# Altium PCB HHOLowCost.PcbDoc
Units mm, origin at the board's own origin, x right, y up, seen from the top; angles counter-clockwise.
Board outline 75.25 x 50.25 mm, 2 copper layers (Top Layer, Bottom Layer); 52 components, 29 nets, 578 pads, 8 vias.
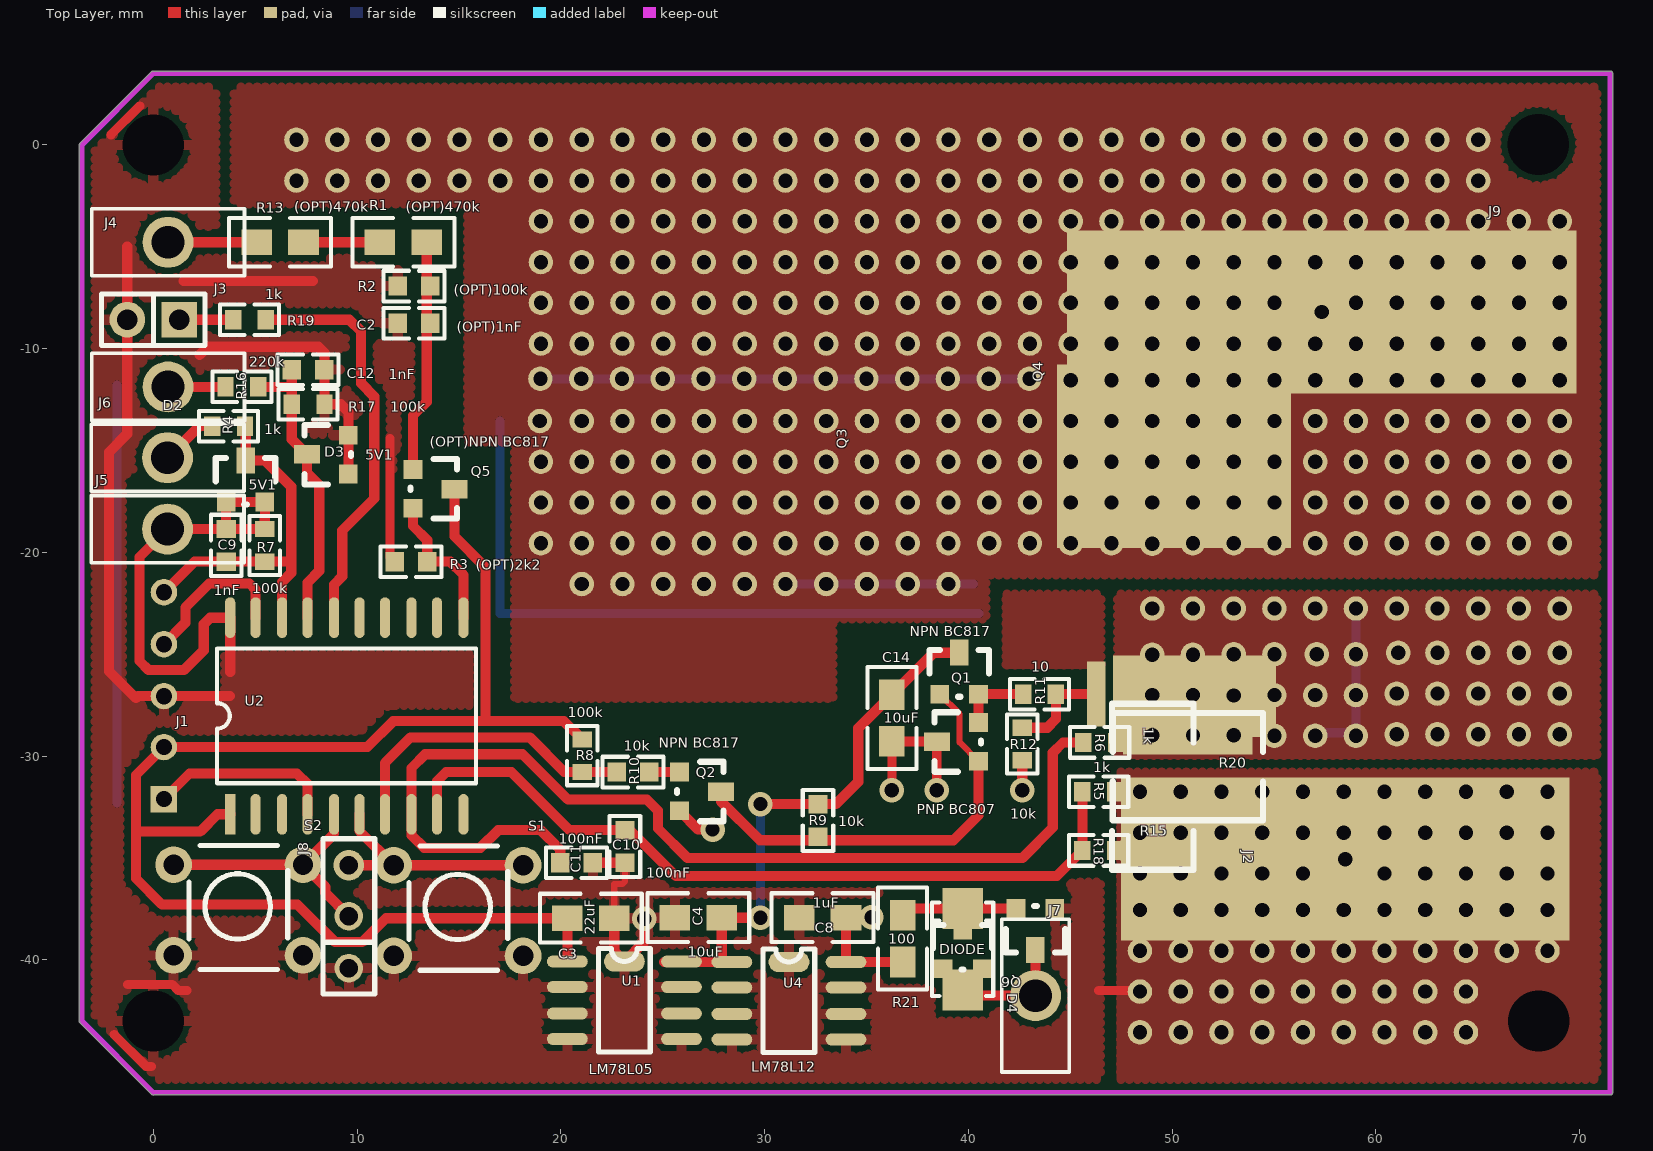
[diagram p0: Top Layer view]
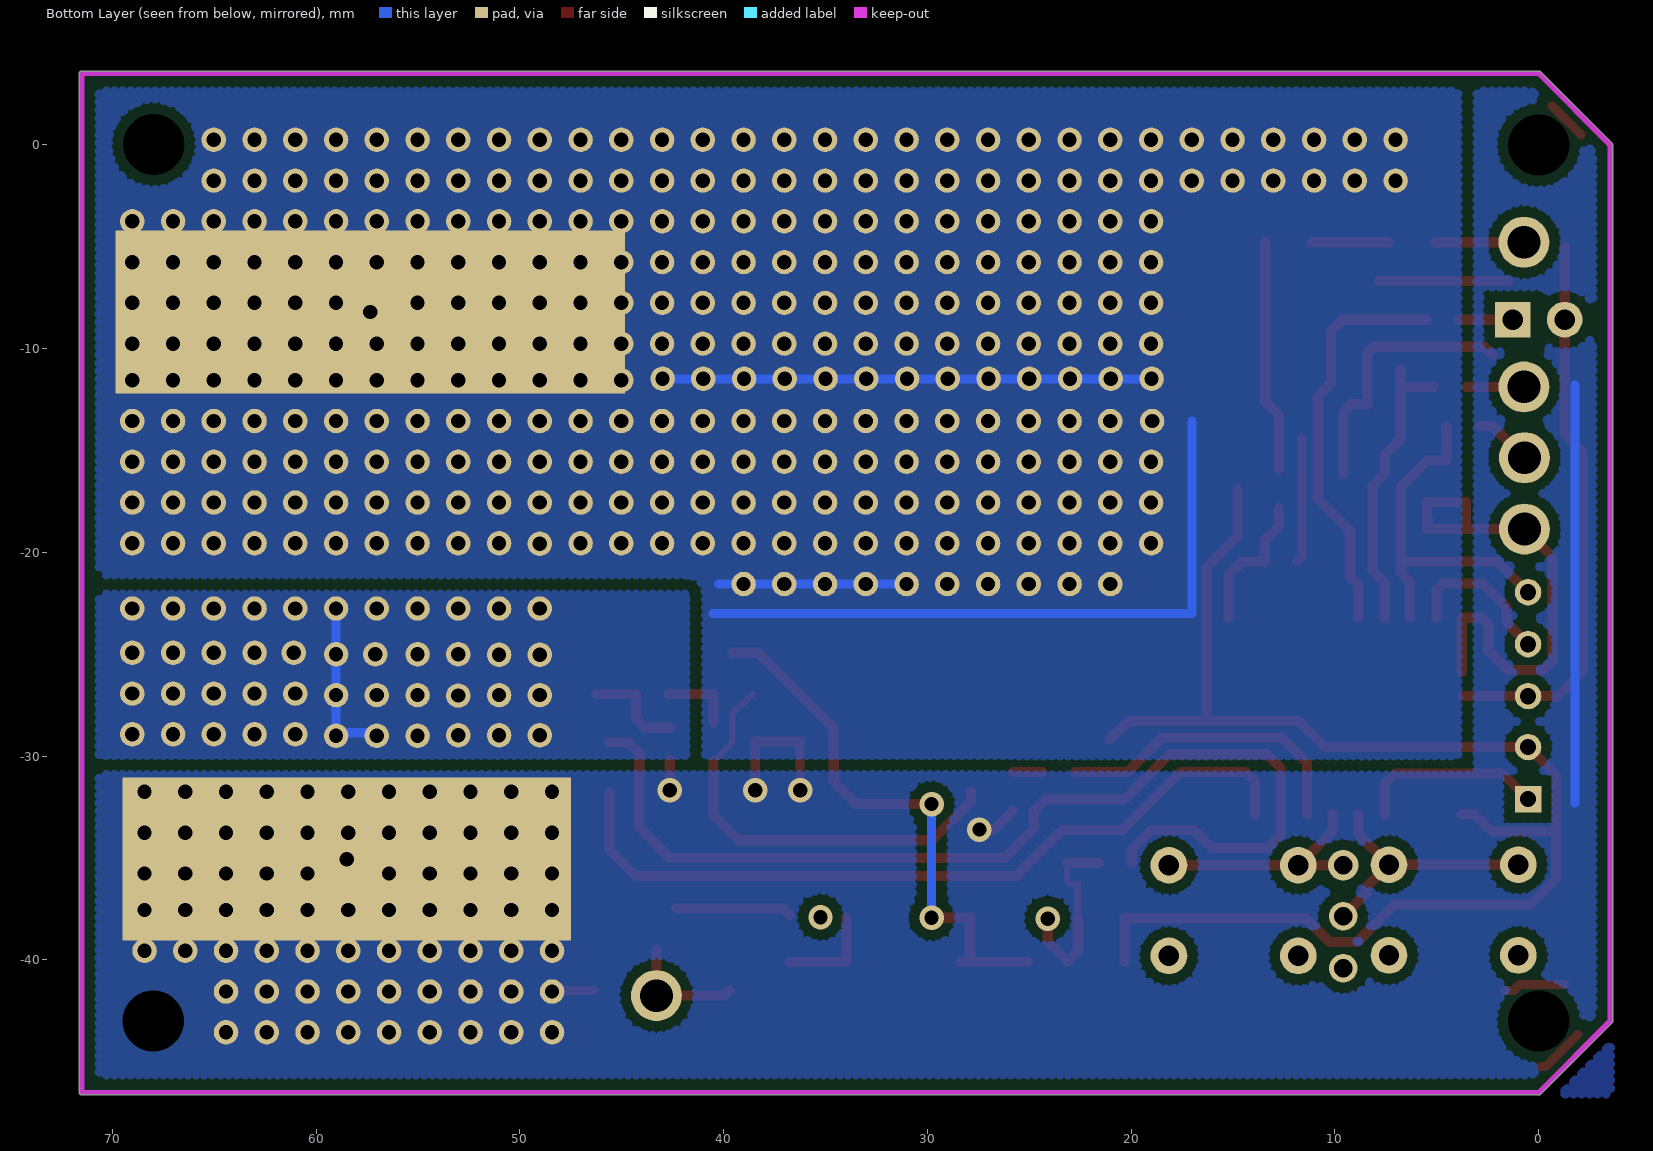
[diagram p1: Bottom Layer view, seen from below]

## Layer stack, top to bottom
Top Layer: signal copper 0.0356
Dielectric: dielectric 0.32, FR-4, Dk 4.8
Bottom Layer: signal copper 0.0356

## Board outline
-3.627,-43 -3.627,0 cw(c-3.5,0) -3.59,0.091 -3.59,0.09 -0.09,3.59 cw(c0,3.5) 0.022,3.625 71.5,3.625 cw(c71.5,3.5) 71.625,3.5 71.625,-46.5 cw(c71.5,-46.5) 71.5,-46.625 0.022,-46.625 cw(c0,-46.5) -0.09,-46.59 -3.59,-43.09 -3.59,-43.091 cw(c-3.5,-43)

## Design rules (kind name [scope] priority, off if disabled: settings)
Clearance "Clearance Polygon" [OnLayer('Bottom Layer')] p1: gap=0.5
Clearance "Clearance Keepout" [OnLayer('Keep-Out Layer')] p2: gap=0.3
Clearance [All] p3: gap=0.3
ComponentClearance [All] p1 off: gap=0 collisioncheckmode=3 verticalgap=0.254 showdistances=FALSE
FabricationTestPointUsage TestPointUsage [All] p1: valid=0 allowmultiple=FALSE
FabricationTestpoint Testpoint [All] p1: side=3 testpointundercomponent=TRUE minsize=1.016 maxsize=2.54 preferedsize=1.524 minholesize=0 maxholesize=1.016 preferedholesize=0.813 testpointgrid=0.025 allowsidetop=TRUE allowsidebottom=TRUE usegrid=TRUE gridtolerance=0
HoleSize [All] p1: absolutevalues=TRUE maxlimit=5 minlimit=0.7 maxpercent=80.000 minpercent=20.000
PolygonConnect PolygonConnectGNDNO [InNet('GND')] p1: connectstyle=NoConnect reliefconductorwidth=0.5 reliefentries=4 polygonreliefangle="90 Angle" airgapwidth=0.254
PolygonConnect PolygonConnectGND_RELIEF [InNet('GND')] p2: connectstyle=Relief reliefconductorwidth=0.5 reliefentries=4 polygonreliefangle="90 Angle" airgapwidth=0.254
PolygonConnect [All] p3: connectstyle=Direct reliefconductorwidth=0.5 reliefentries=4 polygonreliefangle="90 Angle" airgapwidth=0.254
RoutingVias [All] p1: holewidth=0.711 width=1.27 viastyle="Through Hole" minholewidth=0.711 minwidth=1.27 maxholewidth=0.711 maxwidth=1.27
SilkToSolderMaskClearance SilkscreenOverComponentPads [IsPad] p1: minsilkscreentomaskgap=0.254 clearancetoexposedcopper=TRUE
SolderMaskExpansion [All] p1: expansion=0.102
Width [All] p1: maxlimit=5 minlimit=0.3 preferedwidth=0.5 bottomlayer_prefwidth=0.45 minimp=50.000000 maximp=50.000000 favimp=50.000000
23 further rules are at their usual default settings.

## Components (designator, comment, footprint, x,y, rotation, side; value= is the part's Value field where it differs from the comment)
C2 "(OPT)1nF" "0603 CAP" 12.8,-8.75 r180 top
C3 "22uF" 0805 20.325,-37.95 r0 top (schematic designator C?)
C4 "10uF" 0805 27.9,-37.925 r180 top (schematic designator C?)
C8 "1uF" 0805 34,-37.925 r180 top
C9 "1nF" "0603 CAP" 3.575,-19.65 r90 top (schematic designator C21)
C10 "100nF" "0603 CAP" 23.15,-34.425 r270 top (schematic designator C1)
C11 "100nF" "0603 CAP" 20.775,-35.225 r0 top (schematic designator C18)
C12 "1nF" "0603 CAP" 7.6,-11.025 r0 top (schematic designator C43)
C14 "10uF" 0805 36.25,-29.275 r90 top (schematic designator C3)
D2 "5V1" "SOT-23 2 PIN" 3.575,-17.525 r0 top (schematic designator D?)
D3 "5V1" "SOT-23 2 PIN" 9.575,-16.15 r90 top (schematic designator D?)
D4 "DIODE" "SMA + SOT23" 39.725,-37.475 r270 top
J1 "CON5" "SIP5 - PGM" 0.525,-32.1 r90 top
J2 "CON1" "HD 11MM 1P"#1 58.5,-35.05 r270 top
J3 "LED CELL" SIP2 1.275,-8.575 r180 top (schematic designator J6)
J4 "CON1" "HD-351 1P" 0.725,-4.775 r270 top
J5 "CON2" "HD-351 2P" 0.7,-15.35 r270 top
J6 "CON1" "HD-351 1P" 0.725,-11.875 r90 top
J7 "CON1" "HD-351 1P" 43.3,-41.75 r180 top
J8 "CON3" SIP3 9.6,-40.4 r90 top
J9 "CON1" "HD 11MM 1P"#2 57.35,-8.2 r90 top
Q1 "NPN BC817" SOT-23 38.6,-26.95 r0 top (schematic designator Q?)
Q2 "NPN BC817" SOT-23 25.825,-30.775 r270 top (schematic designator Q1)
Q3 "PNP BC807" SOT-23 40.5,-30.25 r90 top (schematic designator Q2)
Q4 "MOSFET N" "D2-PACK - 7" 50.1,-26.95 r90 top
Q5 "(OPT)NPN BC817" SOT-23 12.75,-15.925 r270 top
Q6 "MOSFET P" SOT-23 44.25,-37.475 r180 top
R1 "(OPT)470k" 0805 13.425,-4.775 r180 top
R2 "(OPT)100k" 0603 12.8,-6.925 r180 top
R3 "(OPT)2k2" 0603 12.65,-20.45 r180 top
R4 "1k" "0603 RES" 3.7,-13.8 r180 top
R5 "1k" "0603 RES" 46.4,-31.75 r0 top (schematic designator R1)
R6 "1k" "0603 RES" 46.45,-29.325 r0 top (schematic designator R16)
R7 "100k" "0603 RES" 5.475,-19.65 r270 top (schematic designator R3)
R8 "100k" "0603 RES" 21.05,-29.975 r90 top (schematic designator R38)
R9 "10k" 0603 32.625,-33.15 r270 top (schematic designator R2)
R10 "10k" 0603 23.55,-30.775 r0 top (schematic designator R5)
R11 "10" "0603 RES" 43.5,-26.95 r0 top (schematic designator R6)
R12 "10k" "0603 RES" 42.65,-29.4 r90 top (schematic designator R7)
R13 "(OPT)470k" 0805 7.375,-4.775 r180 top
R15 "0.001" 2512 49.05,-28.425 r270 top (schematic designator R8)
R16 "220k" "0603 RES" 4.35,-11.875 r180 top (schematic designator R34)
R17 "100k" "0603 RES" 7.6,-12.725 r180 top (schematic designator R30)
R18 "1k" "0603 RES" 46.4,-34.625 r0 top
R19 "1k" "0603 RES" 4.725,-8.575 r180 top (schematic designator R17)
R20 "0.001" 1225 50.775,-29.15 r270 top
R21 "100" 0805 36.775,-37.8 r270 top
S1 "SW SPST" TACTBUT 11.8,-35.35 r0 top
S2 "SW SPST" TACTBUT 1,-35.325 r0 top
U1 "LM78L05" "SO-8 VOLTREG" 20.325,-40.075 r0 top
U2 "PIC16F1828" SOIC20WIDE 3.775,-32.85 r90 top (schematic designator U3)
U4 "LM78L12" "SO-8 VOLTREG" 28.4,-40.1 r0 top

## Footprints (in the part's own frame and the unit in brackets; to place one, negate y for a bottom-side part, rotate by r counter-clockwise, add the part's x,y. Pads: shape width x height; smd on the part's side, far side on the other; paste and mask are expansions set on the pad)
0603 [mm]
  rect 0.9x0.95 smd: 1(-0.8,0) 2(0.8,0)
  silkscreen extent -1.5,-0.75 1.5,0.75
"0603 CAP" [mm]
  rect 0.9x0.95 smd: 1(-0.8,0) 2(0.8,0)
  silkscreen extent -1.5,-0.75 1.5,0.75
"0603 RES" [mm]
  rect 0.8x0.95 smd: 1(-0.8,0) 2(0.8,0)
  silkscreen extent -1.45,-0.75 1.45,0.75
0805 [mm]
  rect 1.5x1.25 smd: 1(0,0) 2(2.3,0)
  silkscreen extent -1.35,-1.2 3.65,1.2
1225 [mil]
  rect 60x250 smd: 1(0,0) 2(107.28,0)
  silkscreen extent -50,-145 157,145
2512 [mm]
  rect 1x3.2 smd: 1(0,0) 2(6.2,0)
  silkscreen extent -1,-2 7.15,2
"D2-PACK - 7" [mm]
  rect 3.2x0.9 smd: 1(0,3.825) 3(0,2.55) 3(0,1.275) 3(0,-1.275) 3(0,-2.55) 3(0,-3.825)
  rect 9x11.5 smd: 2(11.675,0)
"HD 11MM 1P"#1 [mm]
  rect 8x22 hole 0.7: 1(0,0)
"HD 11MM 1P"#2 [mm]
  rect 8x25 hole 0.7: 1(0,0)
"HD-351 1P" [mm]
  round 2.5 hole 1.6: 1(0,0)
  silkscreen extent -1.65,-3.75 1.65,3.75
"HD-351 2P" [mm]
  round 2.5 hole 1.6: 1(0,0) 2(3.5,0)
  silkscreen extent -1.65,-3.75 5.15,3.75
SIP2 [mm]
  rect 1.75x1.75 hole 1: 1(0,0)
  round 1.75 hole 1: 2(2.55,0)
  silkscreen extent -1.27,-1.27 3.81,1.27
SIP3 [mm]
  round 1.4 hole 0.9: 1(0,0) 2(2.55,0)
  round 1.5 hole 0.9: 3(5.05,0)
  silkscreen extent -1.27,-1.27 6.35,1.27
"SIP5 - PGM" [mm]
  rect 1.3x1.3 hole 0.8: 1(0,0)
  round 1.3 hole 0.8: 2(2.55,0) 3(5.05,0) 4(7.6,0) 5(10.15,0)
"SMA + SOT23" [mm]
  rect 0.9x0.9 smd: A(2.95,-0.95) A(2.95,0.95)
  rect 2x2 smd: A(4,0) K(0,0)
  rect 1.25x0.9 smd: K(0.9,0)
  silkscreen extent -0.3,-1.5 4.3,1.5
"SO-8 VOLTREG" [mm]
  oval 2x0.6 smd: 1(5.6,0) 2(0,-3.8) 2(0,-2.55) 2(0,-1.25) 2(5.6,-3.8) 2(5.6,-2.55) 2(5.6,-1.25) 3(0,0)
  silkscreen extent 1.52,-4.44 4.06,0.64
SOIC20WIDE [mm]
  rect 2x0.5 smd: 1(0,0)
  oval 2x0.5 smd: 2(0,-1.25) 3(0,-2.55) 4(0,-3.8) 5(0,-5.1) 6(0,-6.35) 7(0,-7.6) 8(0,-8.9) 9(0,-10.15) 10(0,-11.45) 11(9.65,-11.45) 12(9.65,-10.15) 13(9.65,-8.9) 14(9.65,-7.6) 15(9.65,-6.35) 16(9.65,-5.1) 17(9.65,-3.8) 18(9.65,-2.55) 19(9.65,-1.25) 20(9.65,0)
  silkscreen extent 1.52,-12.06 8.13,0.65
SOT-23 [mil]
  rect 36x36 smd: 1(0,0) 3(75,0)
  rect 36x50 smd: 2(38,80)
  silkscreen extent -20,-5 95,85
"SOT-23 2 PIN" [mil]
  rect 36x36 smd: 1(0,0) 1(75,0)
  rect 36x50 smd: 2(38,80)
  silkscreen extent -20,-5 95,85
TACTBUT [mm]
  round 1.8 hole 1: 1(0,0) 1(6.35,0) 2(0,-4.45) 2(6.35,-4.45)
  silkscreen extent 0.75,-5.15 5.6,0.95

## Part data
C2 C3 C4 C8 C9 C10 C11 C12 C14: library part CAP, "Capacitor"
D2 D3: library part ZENER1, "Zener Diode"
D4: "Diode"
J1 J2 J4 J5 J6 J7 J8 J9: "Connector"
J3: library part CON2, "Connector"
Q1 Q2 Q5: library part NPN, "NPN Bipolar Transistor"
Q3: library part PNP, "PNP Bipolar Transistor"
R1 R2 R3 R9 R10 R13: library part Res1, "Resistor"
R4 R5 R6 R7 R8 R11 R12 R15 R16 R17 R18 R19 R20 R21: library part RES1
U1 U4: library part VOLTREG
U2: "Microchip Microcontroller"

## Free pads (board coordinates)
  round 1.5 hole 3: 0(0,-43) 0(0,0) 0(67.975,0.025) 0(68,-43)
  round 1.2 hole 0.7: 0(7.025,-1.75) 0(7.025,0.25) 0(9.025,-1.75) 0(9.025,0.25) 0(11.025,-1.75) 0(11.025,0.25) 0(13.025,-1.75) 0(13.025,0.25) 0(15.025,-1.75) 0(15.025,0.25) 0(17.025,-1.75) 0(17.025,0.25) 0(18.975,-13.55) 0(19,-11.475) 0(19.025,-19.55) 0(19.025,-17.55) 0(19.025,-15.55) 0(19.025,-9.75) 0(19.025,-7.75) 0(19.025,-5.75) 0(19.025,-3.75) 0(19.025,-1.75) 0(19.025,0.25) 0(21,-11.475) 0(21.025,-21.55) 0(21.025,-19.55) 0(21.025,-17.55) 0(21.025,-15.55) 0(21.025,-13.55) 0(21.025,-9.75) 0(21.025,-7.75) 0(21.025,-5.75) 0(21.025,-3.75) 0(21.025,-1.75) 0(21.025,0.25) 0(23,-11.475) 0(23.025,-21.55) 0(23.025,-19.55) 0(23.025,-17.55) 0(23.025,-15.55) 0(23.025,-13.55) 0(23.025,-9.75) 0(23.025,-7.75) 0(23.025,-5.75) 0(23.025,-3.75) 0(23.025,-1.75) 0(23.025,0.25) 0(25,-11.475) 0(25.025,-21.55) 0(25.025,-19.55) 0(25.025,-17.55) 0(25.025,-15.55) 0(25.025,-13.55) 0(25.025,-9.75) 0(25.025,-7.75) 0(25.025,-5.75) 0(25.025,-3.75) 0(25.025,-1.75) 0(25.025,0.25) 0(27,-11.475) 0(27.025,-21.55) 0(27.025,-19.55) 0(27.025,-17.55) 0(27.025,-15.55) 0(27.025,-13.55) 0(27.025,-9.75) 0(27.025,-7.75) 0(27.025,-5.75) 0(27.025,-3.75) 0(27.025,-1.75) 0(27.025,0.25) 0(29,-11.475) 0(29.025,-21.55) 0(29.025,-19.55) 0(29.025,-17.55) 0(29.025,-15.55) 0(29.025,-13.55) 0(29.025,-9.75) 0(29.025,-7.75) 0(29.025,-5.75) 0(29.025,-3.75) 0(29.025,-1.75) 0(29.025,0.25) 0(31,-11.475) 0(31.025,-21.55) 0(31.025,-19.55) 0(31.025,-17.55) 0(31.025,-15.55) 0(31.025,-13.55) 0(31.025,-9.75) 0(31.025,-7.75) 0(31.025,-5.75) 0(31.025,-3.75) 0(31.025,-1.75) 0(31.025,0.25) 0(33,-11.475) 0(33.025,-19.55) 0(33.025,-17.55) 0(33.025,-15.55) 0(33.025,-13.55) 0(33.025,-9.75) 0(33.025,-7.75) 0(33.025,-5.75) 0(33.025,-3.75) 0(33.025,-1.75) 0(33.025,0.25) 0(33.025,-21.55) 0(35,-11.475) 0(35.025,-19.55) 0(35.025,-17.55) 0(35.025,-15.55) 0(35.025,-13.55) 0(35.025,-9.75) 0(35.025,-7.75) 0(35.025,-5.75) 0(35.025,-3.75) 0(35.025,-1.75) 0(35.025,0.25) 0(35.025,-21.55) 0(37,-11.475) 0(37.025,-19.55) 0(37.025,-17.55) 0(37.025,-15.55) 0(37.025,-13.55) 0(37.025,-9.75) 0(37.025,-7.75) 0(37.025,-5.75) 0(37.025,-3.75) 0(37.025,-1.75) 0(37.025,0.25) 0(37.025,-21.55) 0(39,-11.475) 0(39.025,-21.55) 0(39.025,-19.55) 0(39.025,-17.55) 0(39.025,-15.55) 0(39.025,-13.55) 0(39.025,-9.75) 0(39.025,-7.75) 0(39.025,-5.75) 0(39.025,-3.75) 0(39.025,-1.75) 0(39.025,0.25) 0(41,-11.475) 0(41.025,-19.55) 0(41.025,-17.55) 0(41.025,-15.55) 0(41.025,-13.55) 0(41.025,-9.75) 0(41.025,-7.75) 0(41.025,-5.75) 0(41.025,-3.75) 0(41.025,-1.75) 0(41.025,0.25) 0(43,-11.475) 0(43.025,-19.55) 0(43.025,-17.55) 0(43.025,-15.55) 0(43.025,-13.55) 0(43.025,-9.75) 0(43.025,-7.75) 0(43.025,-5.75) 0(43.025,-3.75) 0(43.025,-1.75) 0(43.025,0.25) 0(45.025,-19.55) 0(45.025,-17.55) 0(45.025,-15.55) 0(45.025,-13.55) 0(45.025,-9.75) 0(45.025,-7.75) 0(45.025,-5.75) 0(45.025,-3.75) 0(45.025,-1.75) 0(45.025,0.25) 0(45.025,-11.55) 0(47.025,-19.55) 0(47.025,-17.55) 0(47.025,-15.55) 0(47.025,-13.55) 0(47.025,-11.55) 0(47.025,-7.75) 0(47.025,-5.75) 0(47.025,-3.75) 0(47.025,-1.75) 0(47.025,0.25) 0(47.025,-9.75) 0(48.425,-43.55) 0(48.425,-41.55) 0(48.425,-39.55) 0(48.425,-37.55) 0(48.425,-35.75) 0(48.425,-33.75) 0(48.425,-31.75) 0(49.025,-28.975) 0(49.025,-27) 0(49.025,-25.025) 0(49.025,-19.575) 0(49.025,-17.55) 0(49.025,-15.55) 0(49.025,-13.55) 0(49.025,-11.55) 0(49.025,-9.75) 0(49.025,-7.75) 0(49.025,-5.75) 0(49.025,-3.75) 0(49.025,-1.75) 0(49.025,0.25) 0(49.025,-22.75) 0(50.425,-43.55) 0(50.425,-41.55) 0(50.425,-39.55) 0(50.425,-37.55) 0(50.425,-35.75) 0(50.425,-33.75) 0(50.425,-31.75) 0(51.025,-11.55) 0(51.025,-9.75) 0(51.025,-7.75) 0(51.025,-5.75) 0(51.025,-3.75) 0(51.025,-1.75) 0(51.025,0.25) 0(51.025,-28.975) 0(51.025,-27) 0(51.025,-25.025) 0(51.025,-19.55) 0(51.025,-17.55) 0(51.025,-15.55) 0(51.025,-13.55) 0(51.025,-22.75) 0(52.425,-43.55) 0(52.425,-41.55) 0(52.425,-39.55) 0(52.425,-37.55) 0(52.425,-35.75) 0(52.425,-33.75) 0(52.425,-31.75) 0(53.025,-28.975) 0(53.025,-27.025) 0(53.025,-25) 0(53.025,-19.55) 0(53.025,-17.55) 0(53.025,-15.55) 0(53.025,-13.55) 0(53.025,-11.55) 0(53.025,-9.75) 0(53.025,-7.75) 0(53.025,-5.75) 0(53.025,-3.75) 0(53.025,-1.75) 0(53.025,0.25) 0(53.025,-22.75) 0(54.425,-43.55) 0(54.425,-41.55) 0(54.425,-39.55) 0(54.425,-37.55) 0(54.425,-35.75) 0(54.425,-33.75) 0(54.425,-31.75) 0(55.025,-11.55) 0(55.025,-9.75) 0(55.025,-7.75) 0(55.025,-5.75) 0(55.025,-3.75) 0(55.025,-1.75) 0(55.025,0.25) 0(55.025,-29) 0(55.025,-27) 0(55.025,-25) 0(55.025,-19.55) 0(55.025,-17.55) 0(55.025,-15.55) 0(55.025,-13.55) 0(55.025,-22.75) 0(56.425,-43.55) 0(56.425,-41.55) 0(56.425,-39.55) 0(56.425,-37.55) 0(56.425,-35.75) 0(56.425,-33.75) 0(56.425,-31.75) 0(57.025,-9.75) 0(57.025,-5.75) 0(57.025,-3.75) 0(57.025,-1.75) 0(57.025,0.25) 0(57.025,-19.55) 0(57.025,-17.55) 0(57.025,-15.55) 0(57.025,-13.55) 0(57.025,-11.55) 0(57.025,-27) 0(57.025,-22.75) 0(57.025,-29) 0(57.1,-25) 0(58.425,-43.55) 0(58.425,-41.55) 0(58.425,-39.55) 0(58.425,-37.55) 0(58.425,-33.75) 0(58.425,-31.75) 0(59.025,-19.55) 0(59.025,-17.55) 0(59.025,-15.55) 0(59.025,-13.55) 0(59.025,-11.55) 0(59.025,-9.75) 0(59.025,-7.75) 0(59.025,-5.75) 0(59.025,-3.75) 0(59.025,-1.75) 0(59.025,0.25) 0(59.025,-27) 0(59.025,-22.75) 0(59.025,-29) 0(59.025,-25) 0(60.425,-43.55) 0(60.425,-41.55) 0(60.425,-39.55) 0(60.425,-37.55) 0(60.425,-35.75) 0(60.425,-33.75) 0(60.425,-31.75) 0(61.025,-9.75) 0(61.025,-7.75) 0(61.025,-5.75) 0(61.025,-3.75) 0(61.025,-1.75) 0(61.025,0.25) 0(61.025,-19.55) 0(61.025,-17.55) 0(61.025,-15.55) 0(61.025,-13.55) 0(61.025,-11.55) 0(61.025,-28.925) 0(61.025,-26.925) 0(61.025,-22.75) 0(61.1,-24.925) 0(62.425,-43.55) 0(62.425,-41.55) 0(62.425,-39.55) 0(62.425,-37.55) 0(62.425,-35.75) 0(62.425,-33.75) 0(62.425,-31.75) 0(63.025,-26.925) 0(63.025,-19.55) 0(63.025,-17.55) 0(63.025,-15.55) 0(63.025,-13.55) 0(63.025,-11.55) 0(63.025,-9.75) 0(63.025,-7.75) 0(63.025,-5.75) 0(63.025,-3.75) 0(63.025,-1.75) 0(63.025,0.25) 0(63.025,-28.925) 0(63.025,-24.925) 0(63.025,-22.75) 0(64.425,-43.55) 0(64.425,-41.55) 0(64.425,-39.55) 0(64.425,-37.55) 0(64.425,-35.75) 0(64.425,-33.75) 0(64.425,-31.75) 0(65.025,-19.55) 0(65.025,-17.55) 0(65.025,-15.55) 0(65.025,-13.55) 0(65.025,-11.55) 0(65.025,-9.75) 0(65.025,-7.75) 0(65.025,-5.75) 0(65.025,-3.75) 0(65.025,-1.75) 0(65.025,0.25) 0(65.025,-28.925) 0(65.025,-26.925) 0(65.025,-24.925) 0(65.025,-22.75) 0(66.425,-39.55) 0(66.425,-37.55) 0(66.425,-35.75) 0(66.425,-33.75) 0(66.425,-31.75) 0(67.025,-19.55) 0(67.025,-17.55) 0(67.025,-15.55) 0(67.025,-13.55) 0(67.025,-11.55) 0(67.025,-9.75) 0(67.025,-7.75) 0(67.025,-5.75) 0(67.025,-3.75) 0(67.025,-28.925) 0(67.025,-26.925) 0(67.025,-24.925) 0(67.025,-22.75) 0(68.425,-39.55) 0(68.425,-37.55) 0(68.425,-35.75) 0(68.425,-33.75) 0(68.425,-31.75) 0(69.025,-19.55) 0(69.025,-17.55) 0(69.025,-15.55) 0(69.025,-13.55) 0(69.025,-11.55) 0(69.025,-9.75) 0(69.025,-7.75) 0(69.025,-5.75) 0(69.025,-3.75) 0(69.025,-28.925) 0(69.025,-26.925) 0(69.025,-24.925) 0(69.025,-22.75)
  oval 2x1 smd: 0(23.125,-40.075) 0(31.2,-40.1)
  rect 8x4 smd: 0(51.1,-27.05)

## Via types
v1: diameter 1.2, hole 0.7, Top Layer to Bottom Layer, 8 vias

## Nets (pads, with @x,y where several pads share a name; then routed paths per layer and width w, separated by ;. In a path a pad name is that pad's centre, name@x,y a point inside that pad or via, vN(x,y) a via of type N, cw(c..) or ccw(c..) an arc to the next point about the centre after c; other vN are vias at no path point)
"12-24V IN": C8.1 R21.2 U4.1 | length 5
  Top Layer w0.5: C8.1 U4.1 R21.2
  other v1: 35.25,-37.9
12V: C4.1 C14.2 Q1.2 R9.1 U1.1 U4.3 | length 27.3
  Top Layer w0.5: U1.1@25.075,-40.1 U4.3 ; U4.3@27.9,-40.075 C4.1 v1(29.8,-37.925) ; v1(29.8,-32.35) R9.1 33.5,-32.35 34.6,-31.25 34.6,-28.625 38.307,-24.918 Q1.2
  Bottom Layer w0.45: v1(29.8,-37.925) v1(29.8,-32.35)
COIL: Q5.3 R3.1 U2.11 | length 7.1
  Top Layer w0.5: Q5.3 12.75,-18.7 13.45,-19.4 R3.1 14.575,-20.45 15.225,-21.1 U2.11
CSFB: C11.1 R6.1 U2.8 | length 52.6
  Top Layer w0.5: C11.1 19.975,-34.575 19.025,-33.625 16.925,-33.625 16.05,-34.5 13.3,-34.5 12.675,-33.875 12.675,-30.575 13.35,-29.9 18.125,-29.9 20.35,-32.125 24.225,-32.125 24.775,-32.675 24.775,-33.55 26.225,-35 42.65,-35 44.15,-33.5 44.15,-29.825 44.65,-29.325 R6.1
CSREF: C10.1 R5.1 R18.1 U2.9 | length 39
  Top Layer w0.5: U2.9 13.925,-31.225 14.375,-30.775 17.575,-30.775 20.425,-33.625 23.4,-33.625 25.65,-35.875 44.35,-35.875 R18.1 45.6,-33.5 R5.1
DRAIN: J9.1 pad.0@7.025,0.25 pad.0@7.025,-1.75 pad.0@9.025,0.25 pad.0@9.025,-1.75 pad.0@11.025,0.25 pad.0@11.025,-1.75 pad.0@13.025,0.25 pad.0@13.025,-1.75 pad.0@15.025,0.25 pad.0@15.025,-1.75 pad.0@17.025,0.25 pad.0@17.025,-1.75 pad.0@18.975,-13.55 pad.0@19,-11.475 pad.0@19.025,0.25 pad.0@19.025,-1.75 pad.0@19.025,-3.75 pad.0@19.025,-5.75 pad.0@19.025,-7.75 pad.0@19.025,-9.75 pad.0@19.025,-15.55 pad.0@19.025,-17.55 pad.0@19.025,-19.55 pad.0@21,-11.475 pad.0@21.025,0.25 pad.0@21.025,-1.75 pad.0@21.025,-3.75 pad.0@21.025,-5.75 pad.0@21.025,-7.75 pad.0@21.025,-9.75 pad.0@21.025,-13.55 pad.0@21.025,-15.55 pad.0@21.025,-17.55 pad.0@21.025,-19.55 pad.0@21.025,-21.55 pad.0@23,-11.475 pad.0@23.025,0.25 pad.0@23.025,-1.75 pad.0@23.025,-3.75 pad.0@23.025,-5.75 pad.0@23.025,-7.75 pad.0@23.025,-9.75 pad.0@23.025,-13.55 pad.0@23.025,-15.55 pad.0@23.025,-17.55 pad.0@23.025,-19.55 pad.0@23.025,-21.55 pad.0@25,-11.475 pad.0@25.025,0.25 pad.0@25.025,-1.75 pad.0@25.025,-3.75 pad.0@25.025,-5.75 pad.0@25.025,-7.75 pad.0@25.025,-9.75 pad.0@25.025,-13.55 pad.0@25.025,-15.55 pad.0@25.025,-17.55 pad.0@25.025,-19.55 pad.0@25.025,-21.55 pad.0@27,-11.475 pad.0@27.025,0.25 pad.0@27.025,-1.75 pad.0@27.025,-3.75 pad.0@27.025,-5.75 pad.0@27.025,-7.75 pad.0@27.025,-9.75 pad.0@27.025,-13.55 pad.0@27.025,-15.55 pad.0@27.025,-17.55 pad.0@27.025,-19.55 pad.0@27.025,-21.55 pad.0@29,-11.475 pad.0@29.025,0.25 pad.0@29.025,-1.75 pad.0@29.025,-3.75 pad.0@29.025,-5.75 pad.0@29.025,-7.75 pad.0@29.025,-9.75 pad.0@29.025,-13.55 pad.0@29.025,-15.55 pad.0@29.025,-17.55 pad.0@29.025,-19.55 pad.0@29.025,-21.55 pad.0@31,-11.475 pad.0@31.025,0.25 pad.0@31.025,-1.75 pad.0@31.025,-3.75 pad.0@31.025,-5.75 pad.0@31.025,-7.75 pad.0@31.025,-9.75 pad.0@31.025,-13.55 pad.0@31.025,-15.55 pad.0@31.025,-17.55 pad.0@31.025,-19.55 pad.0@31.025,-21.55 pad.0@33,-11.475 pad.0@33.025,0.25 pad.0@33.025,-1.75 pad.0@33.025,-3.75 pad.0@33.025,-5.75 pad.0@33.025,-7.75 pad.0@33.025,-9.75 pad.0@33.025,-13.55 pad.0@33.025,-15.55 pad.0@33.025,-17.55 pad.0@33.025,-19.55 pad.0@33.025,-21.55 pad.0@35,-11.475 pad.0@35.025,0.25 pad.0@35.025,-1.75 pad.0@35.025,-3.75 pad.0@35.025,-5.75 pad.0@35.025,-7.75 pad.0@35.025,-9.75 pad.0@35.025,-13.55 pad.0@35.025,-15.55 pad.0@35.025,-17.55 pad.0@35.025,-19.55 pad.0@35.025,-21.55 pad.0@37,-11.475 pad.0@37.025,0.25 pad.0@37.025,-1.75 pad.0@37.025,-3.75 pad.0@37.025,-5.75 pad.0@37.025,-7.75 pad.0@37.025,-9.75 pad.0@37.025,-13.55 pad.0@37.025,-15.55 pad.0@37.025,-17.55 pad.0@37.025,-19.55 pad.0@37.025,-21.55 pad.0@39,-11.475 pad.0@39.025,0.25 pad.0@39.025,-1.75 pad.0@39.025,-3.75 pad.0@39.025,-5.75 pad.0@39.025,-7.75 pad.0@39.025,-9.75 pad.0@39.025,-13.55 pad.0@39.025,-15.55 pad.0@39.025,-17.55 pad.0@39.025,-19.55 pad.0@39.025,-21.55 pad.0@41,-11.475 pad.0@41.025,0.25 pad.0@41.025,-1.75 pad.0@41.025,-3.75 pad.0@41.025,-5.75 pad.0@41.025,-7.75 pad.0@41.025,-9.75 pad.0@41.025,-13.55 pad.0@41.025,-15.55 pad.0@41.025,-17.55 pad.0@41.025,-19.55 pad.0@43,-11.475 pad.0@43.025,0.25 pad.0@43.025,-1.75 pad.0@43.025,-3.75 pad.0@43.025,-5.75 pad.0@43.025,-7.75 pad.0@43.025,-9.75 pad.0@43.025,-13.55 pad.0@43.025,-15.55 pad.0@43.025,-17.55 pad.0@43.025,-19.55 pad.0@45.025,0.25 pad.0@45.025,-1.75 pad.0@45.025,-3.75 pad.0@45.025,-5.75 pad.0@45.025,-7.75 pad.0@45.025,-9.75 pad.0@45.025,-11.55 pad.0@45.025,-13.55 pad.0@45.025,-15.55 pad.0@45.025,-17.55 pad.0@45.025,-19.55 pad.0@47.025,0.25 pad.0@47.025,-1.75 pad.0@47.025,-3.75 pad.0@47.025,-5.75 pad.0@47.025,-7.75 pad.0@47.025,-9.75 pad.0@47.025,-11.55 pad.0@47.025,-13.55 pad.0@47.025,-15.55 pad.0@47.025,-17.55 pad.0@47.025,-19.55 pad.0@49.025,0.25 pad.0@49.025,-1.75 pad.0@49.025,-3.75 pad.0@49.025,-5.75 pad.0@49.025,-7.75 pad.0@49.025,-9.75 pad.0@49.025,-11.55 pad.0@49.025,-13.55 pad.0@49.025,-15.55 pad.0@49.025,-17.55 pad.0@49.025,-19.575 pad.0@51.025,0.25 pad.0@51.025,-1.75 pad.0@51.025,-3.75 pad.0@51.025,-5.75 pad.0@51.025,-7.75 pad.0@51.025,-9.75 pad.0@51.025,-11.55 pad.0@51.025,-13.55 pad.0@51.025,-15.55 pad.0@51.025,-17.55 pad.0@51.025,-19.55 pad.0@53.025,0.25 pad.0@53.025,-1.75 pad.0@53.025,-3.75 pad.0@53.025,-5.75 pad.0@53.025,-7.75 pad.0@53.025,-9.75 pad.0@53.025,-11.55 pad.0@53.025,-13.55 pad.0@53.025,-15.55 pad.0@53.025,-17.55 pad.0@53.025,-19.55 pad.0@55.025,0.25 pad.0@55.025,-1.75 pad.0@55.025,-3.75 pad.0@55.025,-5.75 pad.0@55.025,-7.75 pad.0@55.025,-9.75 pad.0@55.025,-11.55 pad.0@55.025,-13.55 pad.0@55.025,-15.55 pad.0@55.025,-17.55 pad.0@55.025,-19.55 pad.0@57.025,0.25 pad.0@57.025,-1.75 pad.0@57.025,-3.75 pad.0@57.025,-5.75 pad.0@57.025,-9.75 pad.0@57.025,-11.55 pad.0@57.025,-13.55 pad.0@57.025,-15.55 pad.0@57.025,-17.55 pad.0@57.025,-19.55 pad.0@59.025,0.25 pad.0@59.025,-1.75 pad.0@59.025,-3.75 pad.0@59.025,-5.75 pad.0@59.025,-7.75 pad.0@59.025,-9.75 pad.0@59.025,-11.55 pad.0@59.025,-13.55 pad.0@59.025,-15.55 pad.0@59.025,-17.55 pad.0@59.025,-19.55 pad.0@61.025,0.25 pad.0@61.025,-1.75 pad.0@61.025,-3.75 pad.0@61.025,-5.75 pad.0@61.025,-7.75 pad.0@61.025,-9.75 pad.0@61.025,-11.55 pad.0@61.025,-13.55 pad.0@61.025,-15.55 pad.0@61.025,-17.55 pad.0@61.025,-19.55 pad.0@63.025,0.25 pad.0@63.025,-1.75 pad.0@63.025,-3.75 pad.0@63.025,-5.75 pad.0@63.025,-7.75 pad.0@63.025,-9.75 pad.0@63.025,-11.55 pad.0@63.025,-13.55 pad.0@63.025,-15.55 pad.0@63.025,-17.55 pad.0@63.025,-19.55 pad.0@65.025,0.25 pad.0@65.025,-1.75 pad.0@65.025,-3.75 pad.0@65.025,-5.75 pad.0@65.025,-7.75 pad.0@65.025,-9.75 pad.0@65.025,-11.55 pad.0@65.025,-13.55 pad.0@65.025,-15.55 pad.0@65.025,-17.55 pad.0@65.025,-19.55 pad.0@67.025,-3.75 pad.0@67.025,-5.75 pad.0@67.025,-7.75 pad.0@67.025,-9.75 pad.0@67.025,-11.55 pad.0@67.025,-13.55 pad.0@67.025,-15.55 pad.0@67.025,-17.55 pad.0@67.025,-19.55 pad.0@69.025,-3.75 pad.0@69.025,-5.75 pad.0@69.025,-7.75 pad.0@69.025,-9.75 pad.0@69.025,-11.55 pad.0@69.025,-13.55 pad.0@69.025,-15.55 pad.0@69.025,-17.55 pad.0@69.025,-19.55 Q4.2 | length 66.7
  Bottom Layer w0.45: 17.025,-13.55 17.025,-23 40.525,-23 ; pad.0@18.65,-11.5 pad.0@43.2,-11.475 ; pad.0@31.025,-21.55 40.25,-21.55
GATE: Q4.1 R11.2 R12.2 | length 5
  Top Layer w0.5: R12.2 43.875,-28.6 44.3,-28.175 R11.2 Q4.1
GATEOUT: Q1.3 Q3.3 R11.1 | length 3.6
  Top Layer w0.5: Q3.3 40.5,-26.955 Q1.3 R11.1
GND: C2.2 C3.2 C4.2 C8.2 C9.2 C10.2 C11.2 C12.2 C14.1 D2.1 D3.1 J1.3 J2.1 J3.2 J5.2 J8.1 pad.0@0,0 pad.0@0,-43 pad.0@23.125,-40.075 pad.0@31.2,-40.1 pad.0@48.425,-31.75 pad.0@48.425,-33.75 pad.0@48.425,-35.75 pad.0@48.425,-37.55 pad.0@48.425,-39.55 pad.0@48.425,-41.55 pad.0@48.425,-43.55 pad.0@50.425,-31.75 pad.0@50.425,-33.75 pad.0@50.425,-35.75 pad.0@50.425,-37.55 pad.0@50.425,-39.55 pad.0@50.425,-41.55 pad.0@50.425,-43.55 pad.0@52.425,-31.75 pad.0@52.425,-33.75 pad.0@52.425,-35.75 pad.0@52.425,-37.55 pad.0@52.425,-39.55 pad.0@52.425,-41.55 pad.0@52.425,-43.55 pad.0@54.425,-31.75 pad.0@54.425,-33.75 pad.0@54.425,-35.75 pad.0@54.425,-37.55 pad.0@54.425,-39.55 pad.0@54.425,-41.55 pad.0@54.425,-43.55 pad.0@56.425,-31.75 pad.0@56.425,-33.75 pad.0@56.425,-35.75 pad.0@56.425,-37.55 pad.0@56.425,-39.55 pad.0@56.425,-41.55 pad.0@56.425,-43.55 pad.0@58.425,-31.75 pad.0@58.425,-33.75 pad.0@58.425,-37.55 pad.0@58.425,-39.55 pad.0@58.425,-41.55 pad.0@58.425,-43.55 pad.0@60.425,-31.75 pad.0@60.425,-33.75 pad.0@60.425,-35.75 pad.0@60.425,-37.55 pad.0@60.425,-39.55 pad.0@60.425,-41.55 pad.0@60.425,-43.55 pad.0@62.425,-31.75 pad.0@62.425,-33.75 pad.0@62.425,-35.75 pad.0@62.425,-37.55 pad.0@62.425,-39.55 pad.0@62.425,-41.55 pad.0@62.425,-43.55 pad.0@64.425,-31.75 pad.0@64.425,-33.75 pad.0@64.425,-35.75 pad.0@64.425,-37.55 pad.0@64.425,-39.55 pad.0@64.425,-41.55 pad.0@64.425,-43.55 pad.0@66.425,-31.75 pad.0@66.425,-33.75 pad.0@66.425,-35.75 pad.0@66.425,-37.55 pad.0@66.425,-39.55 pad.0@68,-43 pad.0@68.425,-31.75 pad.0@68.425,-33.75 pad.0@68.425,-35.75 pad.0@68.425,-37.55 pad.0@68.425,-39.55 Q2.3 Q3.2 Q6.1 R2.2 R3.2 R5.2 R7.1 R12.1 R15.2 R17.1 R18.2 R20.2 S1.2 S2.2 U1.2 U2.20 U4.2 | length 129.2
  Top Layer w0.3: C3.2 22.625,-36.275 23.025,-36.275 23.15,-36.15 C10.2
  Top Layer w0.45: -2.078,0.5 -0.665,1.913 ; -1.913,-43.665 -0.353,-45.225 -0.1,-45.225 ; -1.25,-41.2 0.926,-41.2 1.226,-41.5 1.65,-41.5 ; 11.625,-14.4 11.625,-20.225 R3.2 ; v1(36.25,-31.675) C14.1 ; v1(38.45,-31.675) Q3.2@38.45,-29.303 ; 46.4,-41.5 pad.0@48.525,-41.5
  Top Layer w0.5: -1.275,-5 -1.275,-14.175 -2.175,-15.075 -2.175,-25.825 -0.85,-27.15 -0.75,-27.05 3.75,-27.05 ; 1.5,-6.675 7.825,-6.675 ; 2.275,-10.3 2.675,-9.9 8.1,-9.9 8.4,-10.2 C12.2 R17.1 9.2,-12.725 9.575,-13.1 9.575,-14.245 D3.1@9.575,-16.15 ; 3.775,-25.85 U2.20 2.8,-23.2 2.475,-23.525 2.475,-24.8 1.5,-25.775 -0.225,-25.775 -0.675,-25.325 -0.675,-20.225 J5.2 C9.2 ; C11.2 C10.2 ; C3.2 22.625,-39.575 23.125,-40.075 24.1,-39.1 v1(24.1,-37.975) ; Q2.3 26.745,-33.6 v1(27.45,-33.6) ; C14.1 Q3.2@38.458,-29.275 ; v1(42.65,-31.675) R12.1 ; C9.2 3.575,-17.525 5.48,-17.525 R7.1 C9.2
  Bottom Layer w0.45: -1.775,-32.3 -1.775,-11.775
HALL: C12.1 D3.2 R16.1 R17.2 U2.17 | length 14.6
  Top Layer w0.5: R16.1 6.8,-11.875 ; C12.1 R17.2 6.8,-14.442 D3.2 7.543,-16.093 8.15,-16.7 8.15,-20.9 7.575,-21.475 U2.17
INDICATION: R19.1 U2.16 | length 20.1
  Top Layer w0.5: R19.1 9.625,-8.575 10.2,-9.15 10.2,-11.7 10.85,-12.35 10.85,-17.35 10.33,-17.87 9.275,-18.925 9.275,-21.175 8.875,-21.575 U2.16
KLEMA1: J4.1 R13.2 | length 4.3
  Top Layer w0.5: J4.1 R13.2
KNOCK: J5.1 R4.2 | length 2.8
  Top Layer w0.5: J5.1 2.25,-13.8 R4.2
LEDCELL: J3.1 R19.2 | length 2.6
  Top Layer w0.5: J3.1 R19.2
MCLR: J1.1 U2.4 | length 9.3
  Top Layer w0.5: J1.1 1.775,-30.85 7.05,-30.85 7.575,-31.375 U2.4
NetC2_1: C2.1 Q5.1 R1.1 R2.1 | length 11.4
  Top Layer w0.5: Q5.1 12.75,-13.275 13.425,-12.6 R1.1
NetQ1_1: Q1.1 Q2.2 Q3.1 R9.2 | length 21.1
  Top Layer w0.3: Q1.1 39.575,-27.925 39.575,-29.325 Q3.1
  Top Layer w0.5: Q2.2 27.857,-32.207 29.775,-34.125 39.275,-34.125 40.5,-32.9 Q3.1
NetQ2_1: Q2.1 R10.2 | length 1.5
  Top Layer w0.5: R10.2 Q2.1
NetR1_2: R1.2 R13.1 | length 3.8
  Top Layer w0.5: R13.1 R1.2
PCLK: C9.1 D2.2 J1.5 R4.1 R7.2 U2.18 | length 17.9
  Top Layer w0.5: J1.5 2.025,-20.45 6.775,-20.45 ; R4.1@4.54,-13.84 D2.2 5.493,-15.493 6.775,-16.775 6.775,-21 6.325,-21.45 U2.18
PDAT: J1.4 U2.19 | length 7.7
  Top Layer w0.5: J1.4 1.575,-23.45 1.575,-22.7 2.75,-21.525 4.725,-21.525 5.025,-21.825 U2.19
POWER: D4.A J7.1 Q6.2 | length 5.9
  Top Layer w0.5: D4.A@39.725,-41.475 40,-41.75 J7.1 43.3,-39.522 Q6.2
PROTECT: D4.K Q6.3 R21.1 | length 5.7
  Top Layer w0.5: R21.1 37.1,-37.475 Q6.3
PWM: R8.1 R10.1 U2.7 | length 15.1
  Top Layer w0.5: U2.7 11.375,-30.325 12.625,-29.075 18.475,-29.075 20.175,-30.775 R10.1
RPM: J6.1 R16.2 | length 2.8
  Top Layer w0.5: J6.1 R16.2
RX: J8.2 S2.1 U2.5 | length 12.9
  Top Layer w0.5: S2.1@1,-35.325 S2.1@7.35,-35.325 ; U2.5 8.875,-33.8 S2.1@7.35,-35.325 ; J8.2 8.439,-36.689 8.439,-36.414 S2.1@7.35,-35.325
SOURCE: pad.0@49.025,-22.75 pad.0@49.025,-25.025 pad.0@49.025,-27 pad.0@49.025,-28.975 pad.0@51.1,-27.05 pad.0@51.025,-22.75 pad.0@51.025,-25.025 pad.0@51.025,-27 pad.0@51.025,-28.975 pad.0@53.025,-22.75 pad.0@53.025,-25 pad.0@53.025,-27.025 pad.0@53.025,-28.975 pad.0@55.025,-22.75 pad.0@55.025,-25 pad.0@55.025,-27 pad.0@55.025,-29 pad.0@57.1,-25 pad.0@57.025,-22.75 pad.0@57.025,-27 pad.0@57.025,-29 pad.0@59.025,-22.75 pad.0@59.025,-25 pad.0@59.025,-27 pad.0@59.025,-29 pad.0@61.1,-24.925 pad.0@61.025,-22.75 pad.0@61.025,-26.925 pad.0@61.025,-28.925 pad.0@63.025,-22.75 pad.0@63.025,-24.925 pad.0@63.025,-26.925 pad.0@63.025,-28.925 pad.0@65.025,-22.75 pad.0@65.025,-24.925 pad.0@65.025,-26.925 pad.0@65.025,-28.925 pad.0@67.025,-22.75 pad.0@67.025,-24.925 pad.0@67.025,-26.925 pad.0@67.025,-28.925 pad.0@69.025,-22.75 pad.0@69.025,-24.925 pad.0@69.025,-26.925 pad.0@69.025,-28.925 Q4.3 R6.2 R15.1 R20.1 | length 8.7
  Bottom Layer w0.45: pad.0@56.925,-28.65 56.725,-28.85 59.025,-28.85 pad.0@59.025,-22.75
TX: J8.3 S1.1 U2.6 | length 11.7
  Top Layer w0.5: J8.3 S1.1@18.15,-35.35 ; U2.6 10.125,-33.675 S1.1@11.8,-35.35
VCC: C3.1 J1.2 Q5.2 R8.2 U1.3 U2.1 | length 70.5
  Top Layer w0.5: -0.85,-33.725 -0.825,-33.7 2.3,-33.7 3.15,-32.85 U2.1 ; Q5.2 14.782,-19.207 16.3,-20.725 16.3,-28.275 ; U1.3 C3.1 11.425,-37.95 10.25,-39.125 8.925,-39.125 7.075,-37.275 0.425,-37.275 -0.85,-36 -0.85,-30.925 J1.2 10.5,-29.55 11.775,-28.275 20.15,-28.275 R8.2
pads on no net: U2.2 U2.3 U2.10 U2.12 U2.13 U2.14 U2.15

## Polygon pours and split planes (outlines as drawn)
GND on Top Layer "Top Layer-GND 2" (hatched 90Degree grid 0.4 track 0.45, remove dead copper, pour order 26): 46.475,-46.55 46.475,-36.175 -3.525,-36.175 -3.525,-46.55
GND on Top Layer "Top Layer-GND 1" (hatched 90Degree grid 0.4 track 0.45, remove dead copper, pour order 28): 15.65,-16.14 15.65,-3.1 -3.35,-3.1 -3.35,-16.14
GND on Top Layer "Top Layer-GND 3" (hatched 90Degree grid 0.4 track 0.45, remove dead copper, pour order 24): 15.65,-38.575 15.65,-27.025 -3.575,-27.025 -3.575,-38.575
GND on Top Layer "Top Layer-GND 4" (hatched 90Degree grid 0.4 track 0.45, remove dead copper, pour order 22): 3.5,-27.65 15.7,-27.65 15.7,-24.975 3.5,-24.975
GND on Top Layer "Top Layer-GND 5" (hatched 90Degree grid 0.4 track 0.45, remove dead copper, pour order 20): 71.3,-46.375 71.3,-30.775 47.475,-30.775 47.475,-46.375
SOURCE on Top Layer "Top Layer-SOURCE" (hatched 90Degree grid 0.4 track 0.45, remove dead copper, pour order 18): 71.401,-29.95 71.401,-22.05 47.325,-22.05 47.325,-29.95
DRAIN on Top Layer "Top Layer-DRAIN" (hatched 90Degree grid 0.4 track 0.45, remove dead copper, pour order 16): 71.402,-21.1 71.402,3.4 17.725,3.4 17.725,-21.1
DRAIN on Top Layer "Top Layer-DRAIN 1" (hatched 90Degree grid 0.4 track 0.45, remove dead copper, pour order 14): 19.1,-2.9 19.1,3.4 3.975,3.4 3.975,-2.9
DRAIN on Top Layer "Top Layer-DRAIN 2" (hatched 90Degree grid 0.4 track 0.45, remove dead copper, pour order 12): 19.35,-14.575 19.35,-1.75 15.425,-1.75 15.425,-14.575
DRAIN on Top Layer "Top Layer-DRAIN 3" (hatched 90Degree grid 0.4 track 0.45, remove dead copper, pour order 10): 33.35,-27.175 33.35,-20.3 17.725,-20.3 17.725,-27.175
DRAIN on Top Layer "Top Layer-DRAIN 4" (hatched 90Degree grid 0.4 track 0.45, remove dead copper, pour order 8): 40.875,-23.25 40.875,-19.275 31.25,-19.275 31.25,-23.25
GATE on Top Layer "Top Layer-GATE" (hatched 90Degree grid 0.4 track 0.45, remove dead copper, pour order 6): 46.5,-25.525 46.5,-22.05 41.85,-22.05 41.85,-25.525
GND on Top Layer "Top Layer-GND 6" (hatched 90Degree grid 0.4 track 0.45, remove dead copper, pour order 4): 3.075,-14.725 3.075,3.375 -3.4,3.375 -3.4,-14.725
GND on Top Layer "Top Layer-GND 7" (hatched 90Degree grid 0.4 track 0.45, remove dead copper, pour order 2): -1.525,-34.125 -1.525,-16.025 -3.05,-16.025 -3.05,-34.125
GND on Bottom Layer "Bottom Layer-GND" (hatched 90Degree grid 0.4 track 0.45, pour order 42): 71.375,-30.775 41.85,-30.775 41.85,-46.425 71.375,-46.425
SOURCE on Bottom Layer "Bottom Layer-SOURCE" (hatched 90Degree grid 0.4 track 0.45, remove dead copper, pour order 40): 71.4,-29.95 71.4,-22.05 41.85,-22.05 41.85,-29.95
GND on Bottom Layer "Bottom Layer-GND 1" (hatched 90Degree grid 0.4 track 0.45, pour order 38): 43.9,-30.9 26.275,-30.9 26.275,-35.475 43.9,-35.475
GND on Bottom Layer "Bottom Layer-GND 2" (hatched 90Degree grid 0.4 track 0.45, pour order 36): 43.9,-30.925 -3.525,-30.925 -3.525,-46.575 43.9,-46.575
GND on Bottom Layer "Bottom Layer-GND 3" (hatched 90Degree grid 0.4 track 0.45, remove dead copper, pour order 34): 3.025,3.4 -3.525,3.4 -3.525,-37.975 3.025,-37.975
DRAIN on Bottom Layer "Bottom Layer-DRAIN" (hatched 90Degree grid 0.4 track 0.45, remove dead copper, pour order 32): 71.301,-30.925 71.301,3.3 2.875,3.3 2.875,-30.925
POWER on Top Paste (hatched 90Degree grid 0.4 track 0.45, remove dead copper): 51.05,-12.2 61.05,-12.2 61.05,-19.775 51.05,-19.775
no net on Top Solder (hatched 90Degree grid 0.4 track 0.45, remove dead copper): 65.775,-2.7 65.775,1.025 37.85,1.025 37.85,-2.7
no net on Top Solder (hatched 90Degree grid 0.4 track 0.45, remove dead copper): 39.7,-22.5 39.7,1.025 18.401,1.025 18.401,-22.5
no net on Top Solder (hatched 90Degree grid 0.4 track 0.45, remove dead copper): 41.875,-20.475 41.875,-2.3 38.7,-2.3 38.7,-20.475
no net on Top Solder (hatched 90Degree grid 0.4 track 0.45, remove dead copper): 32.7,-26.5 32.7,-22.175 18.4,-22.175 18.4,-26.5
no net on Top Solder (hatched 90Degree grid 0.4 track 0.45, remove dead copper): 65.825,-44.425 65.825,-40.65 49.751,-40.65 49.751,-44.425
no net on Bottom Solder (hatched 90Degree grid 0.4 track 0.45, remove dead copper): 69.85,-20.025 69.85,1.8 4.875,1.8 4.875,-20.025
no net on Bottom Solder (hatched 90Degree grid 0.4 track 0.45, remove dead copper): 40,-29.05 40,-16.625 4.875,-16.625 4.875,-29.05
no net on Bottom Solder (hatched 90Degree grid 0.4 track 0.45, remove dead copper): 69.025,-28.925 69.025,-22.8 43.125,-22.8 43.125,-28.925
no net on Bottom Solder (hatched 90Degree grid 0.4 track 0.45, remove dead copper): 69.676,-44.65 69.676,-31.925 46.1,-31.925 46.1,-44.65
no net on Bottom Solder (hatched 90Degree grid 0.4 track 0.45, remove dead copper): 27.3,-44.725 27.3,-31.725 20.75,-31.725 20.75,-44.725
no net on Bottom Solder (hatched 90Degree grid 0.4 track 0.45, remove dead copper): 39.475,-44.7 39.475,-39.75 25.9,-39.75 25.9,-44.7
no net on Bottom Solder (hatched 90Degree grid 0.4 track 0.45, remove dead copper): 40.5,-34 32.05,-34 32.05,-44.7 40.5,-44.7

## Keep-outs
Keep-Out Layer:
  lines w0.25: 0,-46.5 71.5,-46.5 71.5,3.5 0,3.5
  lines w0.254: 0,-46.5 -3.5,-43 -3.5,0 0,3.5